# EAGLE board 12668-ACS723_Low_Current_Sensor-panel.v10 (EAGLE 7.5.0), part 1 of 4
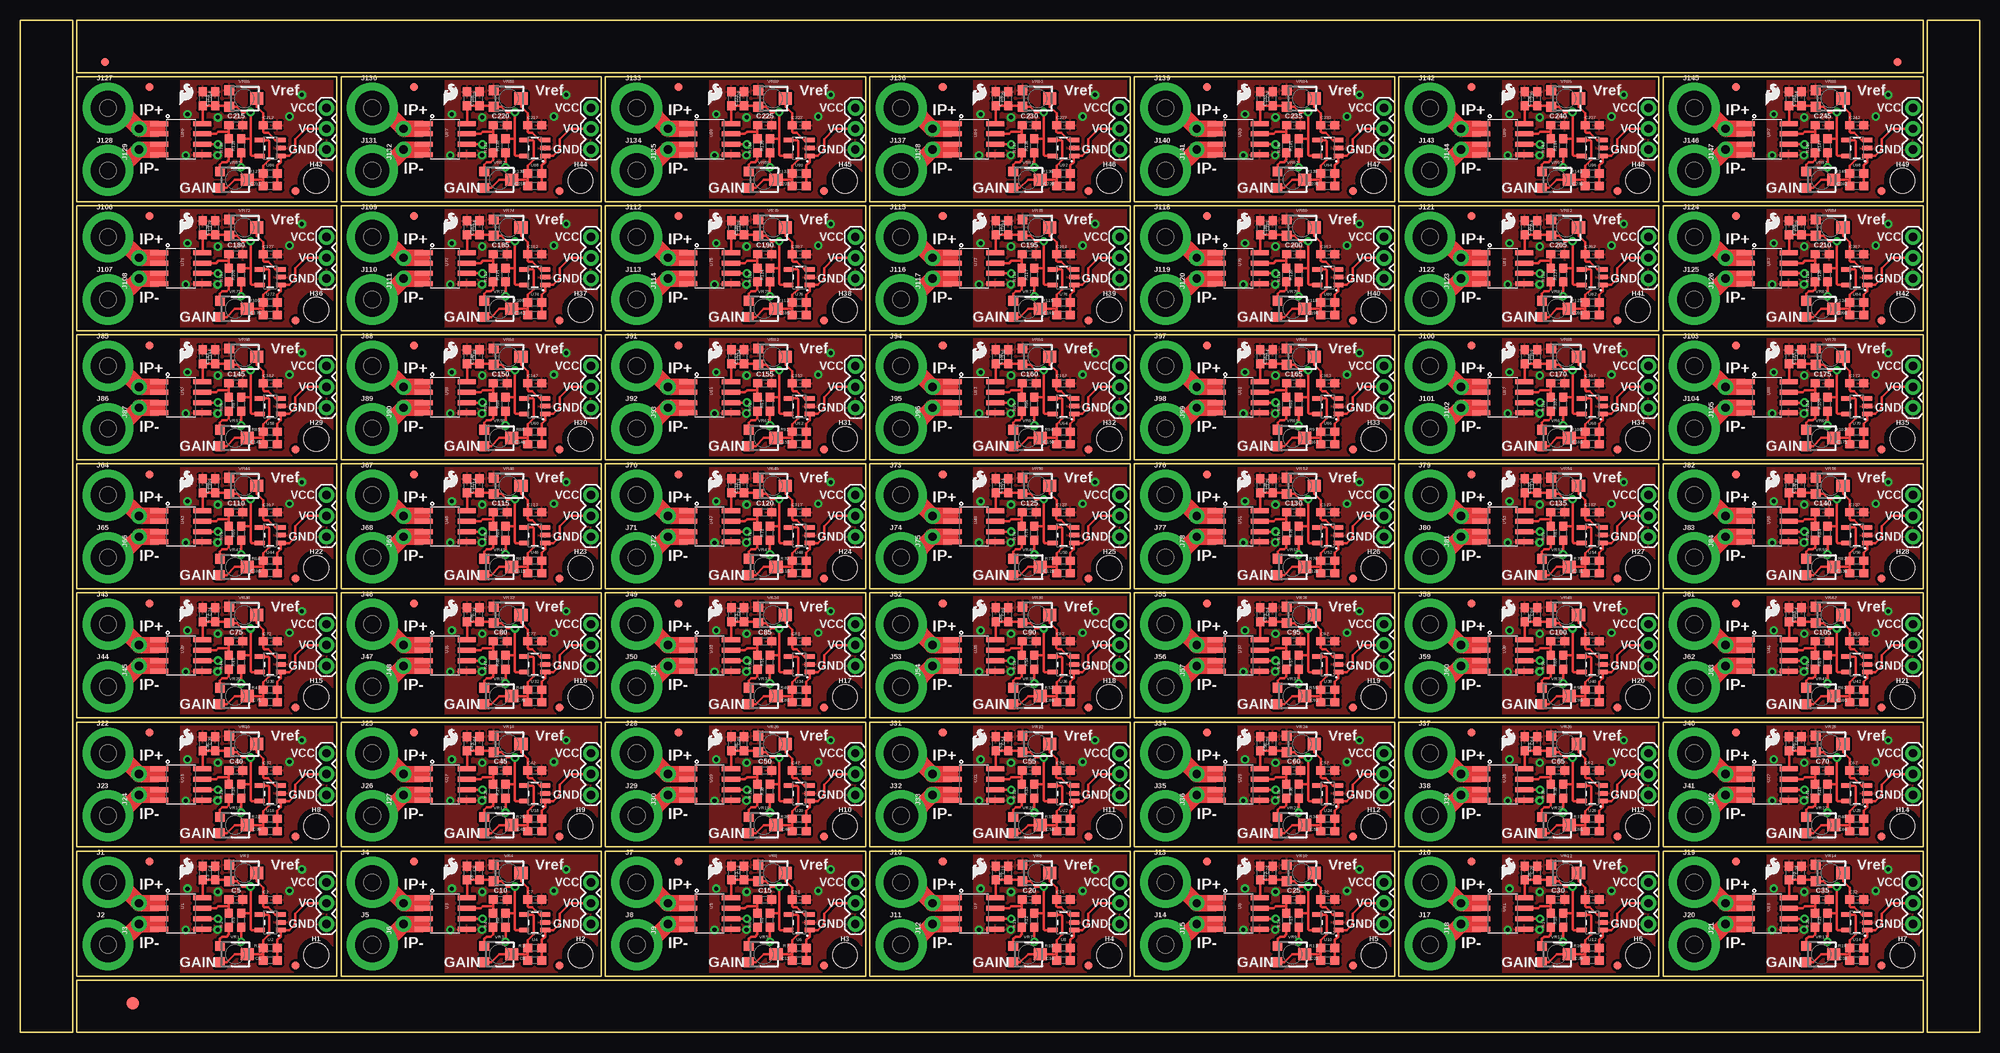
[diagram p0: board, top side]
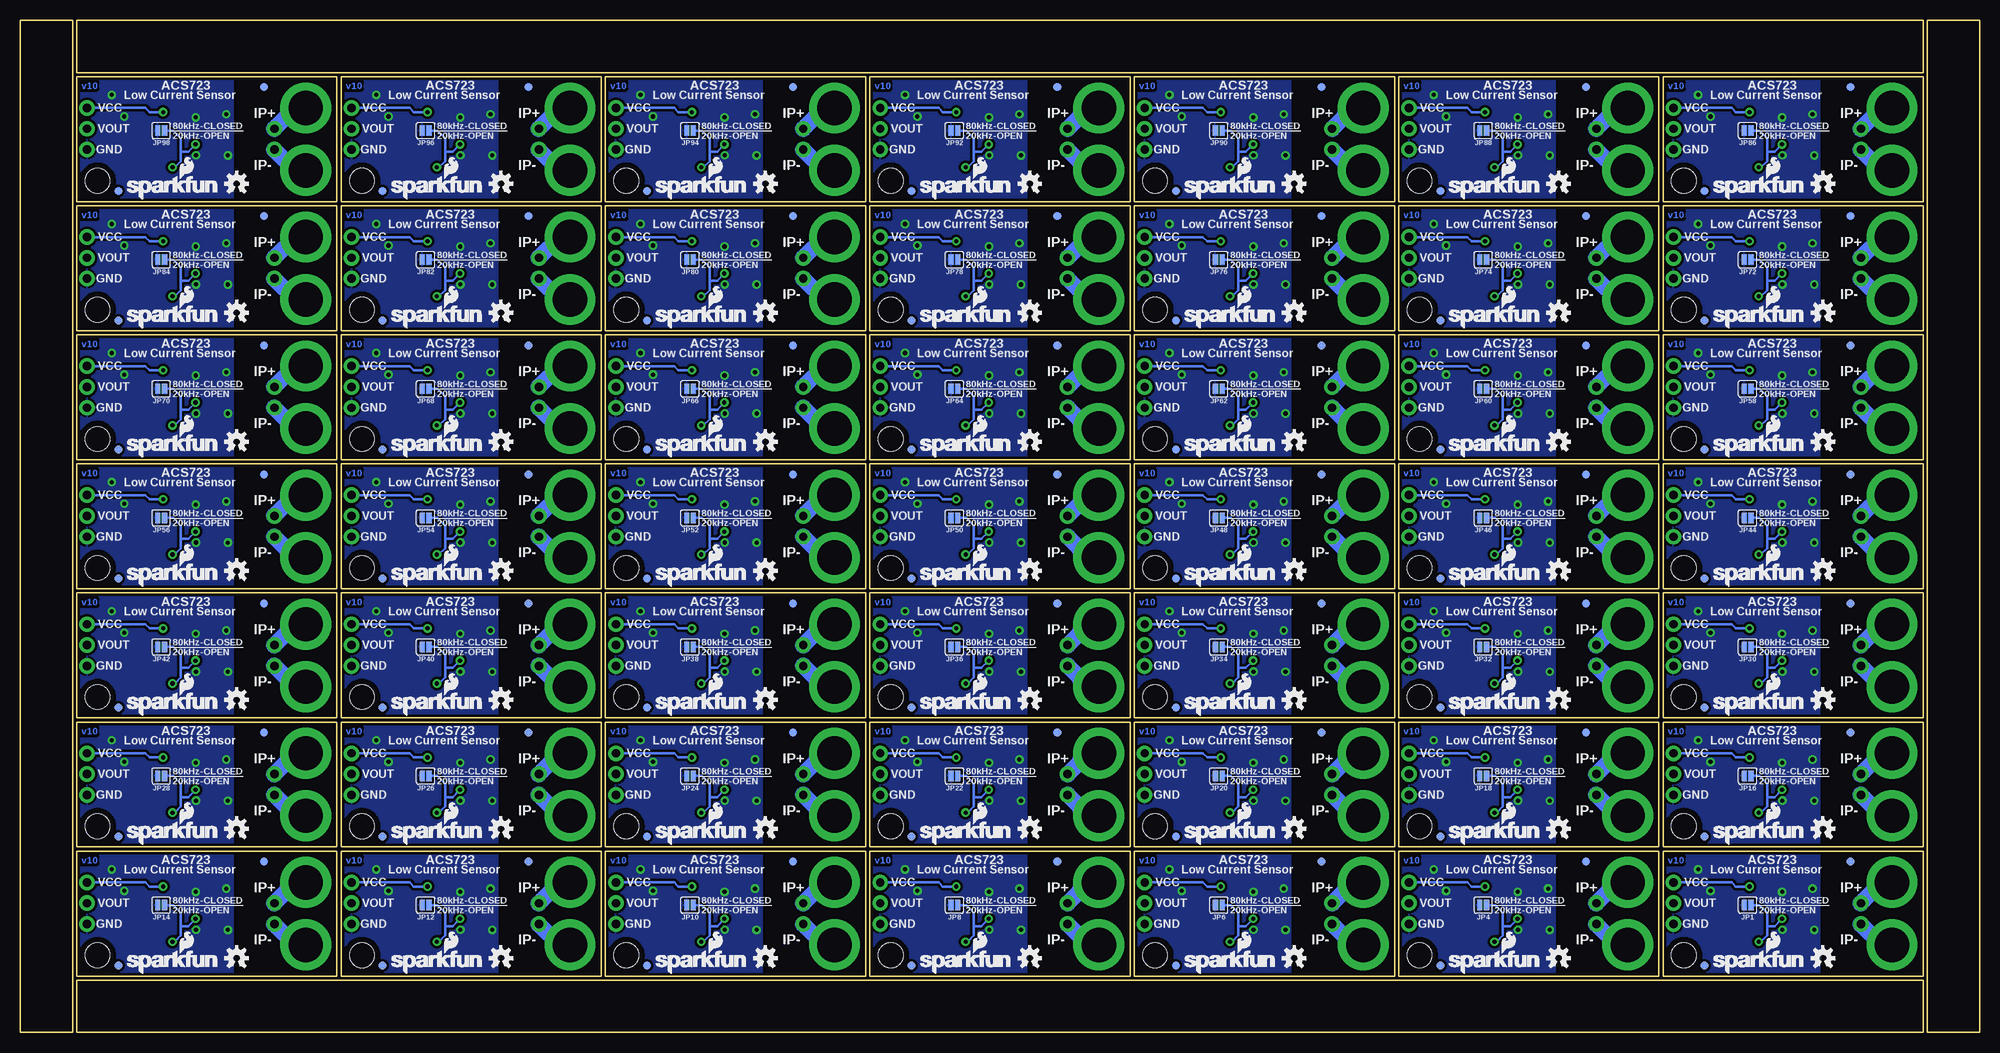
[diagram p1: board, bottom side, seen from below]

Size 239.01 x 123.44 mm. Coordinates in mm from the lower left corner, seen from the top.
Outline: 220 segments
Copper layers (1*16): Top 0.035mm / dielectric 1.5mm / Bottom 0.035mm
Design rules "SparkFun-2-layer-STANDARD": minimum track width 10mil, minimum drill 20mil, track to track 10mil, track to pad 8mil, pad to pad 8mil, via to via 10mil, smd to smd 8mil, copper to edge 8mil, drill to drill 8mil, minimum pad ring 10mil, minimum via ring 10mil, stop-mask expansion 4mil, vias tented up to drill 25mil, thermal gap 10mil
Net classes: 1 8_mil: width 0.203 mm; 2 10_mil: width 0.254 mm; 3 12_mil: width 0.305 mm; 4 15_mil: width 0.381 mm; 5 20_mil: width 0.508 mm; 6 25_mil: width 0.635 mm; 7 30_mil: width 0.762 mm

## Footprints (pad centres in the part's own frame; a part is rotated, then mirrored left to right if it is on the bottom)
0603 = smd 1.1 x 1: 1 -0.85,0; 2 0.85,0
FIDUCIAL-1.5X3 = smd 1.5 x 1.5: 1 0,0
FIDUCIAL-1X2 = smd 1 x 1: 1 0,0
STAND-OFF-TIGHT = hole 3.048: 0,0
SMTSO-256-ET-0.165DIA = drill 4.191 pad 6.198: P$1 0,0
1X02_NO_SILK = drill 1.016 pad 1.88: 1 0,0; 2 2.54,0
SMT-JUMPER_2_NO_SILK = smd 0.635 x 1.27: 1 -0.406,0; 2 0.406,0
1X03 = drill 1.016 pad 1.88: 1 0,0; 2 2.54,0; 3 5.08,0
SO08 = smd 0.61 x 2.21: 1 -1.905,-2.616; 2 -0.635,-2.616; 3 0.635,-2.616; 4 1.905,-2.616; 5 1.905,2.616; 6 0.635,2.616; 7 -0.635,2.616; 8 -1.905,2.616
SOT23-5 = smd 0.55 x 1.2: 1 -0.95,-1.3; 2 0,-1.3; 3 0.95,-1.3; 4 0.95,1.3; 5 -0.95,1.3
TRIMPOT-SMD-TC33X = smd 1.2 x 1.2: 1 -1,-1.825; 3 1,-1.825 | smd 1.5 x 1.6: 2 0,1.5

## Placement (x,y rotation side)
C1  100pF  [0603]  30.48,8.76 180 top
C2  0.1uF  [0603]  30.48,16.19 0 top
C3  0.1uF  [0603]  23.75,19.43 90 top
C4  0.1uF  [0603]  22.23,19.43 270 top
C5  1nF  [0603]  26.29,16.19 0 top
C6  100pF  [0603]  62.74,8.76 180 top
C7  0.1uF  [0603]  62.74,16.19 0 top
C8  0.1uF  [0603]  56.01,19.43 90 top
C9  0.1uF  [0603]  54.48,19.43 270 top
C10  1nF  [0603]  58.55,16.19 0 top
C11  100pF  [0603]  95,8.76 180 top
C12  0.1uF  [0603]  95,16.19 0 top
C13  0.1uF  [0603]  88.27,19.43 90 top
C14  0.1uF  [0603]  86.74,19.43 270 top
C15  1nF  [0603]  90.81,16.19 0 top
C16  100pF  [0603]  127.25,8.76 180 top
C17  0.1uF  [0603]  127.25,16.19 0 top
C18  0.1uF  [0603]  120.52,19.43 90 top
C19  0.1uF  [0603]  119,19.43 270 top
C20  1nF  [0603]  123.06,16.19 0 top
C21  100pF  [0603]  159.51,8.76 180 top
C22  0.1uF  [0603]  159.51,16.19 0 top
C23  0.1uF  [0603]  152.78,19.43 90 top
C24  0.1uF  [0603]  151.26,19.43 270 top
C25  1nF  [0603]  155.32,16.19 0 top
C26  100pF  [0603]  191.77,8.76 180 top
C27  0.1uF  [0603]  191.77,16.19 0 top
C28  0.1uF  [0603]  185.04,19.43 90 top
C29  0.1uF  [0603]  183.51,19.43 270 top
C30  1nF  [0603]  187.58,16.19 0 top
C31  100pF  [0603]  224.03,8.76 180 top
C32  0.1uF  [0603]  224.03,16.19 0 top
C33  0.1uF  [0603]  217.3,19.43 90 top
C34  0.1uF  [0603]  215.77,19.43 270 top
C35  1nF  [0603]  219.84,16.19 0 top
C36  100pF  [0603]  30.48,24.51 180 top
C37  0.1uF  [0603]  30.48,31.94 0 top
C38  0.1uF  [0603]  23.75,35.18 90 top
C39  0.1uF  [0603]  22.23,35.18 270 top
C40  1nF  [0603]  26.29,31.94 0 top
C41  100pF  [0603]  62.74,24.51 180 top
C42  0.1uF  [0603]  62.74,31.94 0 top
C43  0.1uF  [0603]  56.01,35.18 90 top
C44  0.1uF  [0603]  54.48,35.18 270 top
C45  1nF  [0603]  58.55,31.94 0 top
C46  100pF  [0603]  95,24.51 180 top
C47  0.1uF  [0603]  95,31.94 0 top
C48  0.1uF  [0603]  88.27,35.18 90 top
C49  0.1uF  [0603]  86.74,35.18 270 top
C50  1nF  [0603]  90.81,31.94 0 top
C51  100pF  [0603]  127.25,24.51 180 top
C52  0.1uF  [0603]  127.25,31.94 0 top
C53  0.1uF  [0603]  120.52,35.18 90 top
C54  0.1uF  [0603]  119,35.18 270 top
C55  1nF  [0603]  123.06,31.94 0 top
C56  100pF  [0603]  159.51,24.51 180 top
C57  0.1uF  [0603]  159.51,31.94 0 top
C58  0.1uF  [0603]  152.78,35.18 90 top
C59  0.1uF  [0603]  151.26,35.18 270 top
C60  1nF  [0603]  155.32,31.94 0 top
C61  100pF  [0603]  191.77,24.51 180 top
C62  0.1uF  [0603]  191.77,31.94 0 top
C63  0.1uF  [0603]  185.04,35.18 90 top
C64  0.1uF  [0603]  183.51,35.18 270 top
C65  1nF  [0603]  187.58,31.94 0 top
C66  100pF  [0603]  224.03,24.51 180 top
C67  0.1uF  [0603]  224.03,31.94 0 top
C68  0.1uF  [0603]  217.3,35.18 90 top
C69  0.1uF  [0603]  215.77,35.18 270 top
C70  1nF  [0603]  219.84,31.94 0 top
C71  100pF  [0603]  30.48,40.26 180 top
C72  0.1uF  [0603]  30.48,47.69 0 top
C73  0.1uF  [0603]  23.75,50.93 90 top
C74  0.1uF  [0603]  22.23,50.93 270 top
C75  1nF  [0603]  26.29,47.69 0 top
C76  100pF  [0603]  62.74,40.26 180 top
C77  0.1uF  [0603]  62.74,47.69 0 top
C78  0.1uF  [0603]  56.01,50.93 90 top
C79  0.1uF  [0603]  54.48,50.93 270 top
C80  1nF  [0603]  58.55,47.69 0 top
C81  100pF  [0603]  95,40.26 180 top
C82  0.1uF  [0603]  95,47.69 0 top
C83  0.1uF  [0603]  88.27,50.93 90 top
C84  0.1uF  [0603]  86.74,50.93 270 top
C85  1nF  [0603]  90.81,47.69 0 top
C86  100pF  [0603]  127.25,40.26 180 top
C87  0.1uF  [0603]  127.25,47.69 0 top
C88  0.1uF  [0603]  120.52,50.93 90 top
C89  0.1uF  [0603]  119,50.93 270 top
C90  1nF  [0603]  123.06,47.69 0 top
C91  100pF  [0603]  159.51,40.26 180 top
C92  0.1uF  [0603]  159.51,47.69 0 top
C93  0.1uF  [0603]  152.78,50.93 90 top
C94  0.1uF  [0603]  151.26,50.93 270 top
C95  1nF  [0603]  155.32,47.69 0 top
C96  100pF  [0603]  191.77,40.26 180 top
C97  0.1uF  [0603]  191.77,47.69 0 top
C98  0.1uF  [0603]  185.04,50.93 90 top
C99  0.1uF  [0603]  183.51,50.93 270 top
C100  1nF  [0603]  187.58,47.69 0 top
C101  100pF  [0603]  224.03,40.26 180 top
C102  0.1uF  [0603]  224.03,47.69 0 top
C103  0.1uF  [0603]  217.3,50.93 90 top
C104  0.1uF  [0603]  215.77,50.93 270 top
C105  1nF  [0603]  219.84,47.69 0 top
C106  100pF  [0603]  30.48,56.01 180 top
C107  0.1uF  [0603]  30.48,63.44 0 top
C108  0.1uF  [0603]  23.75,66.67 90 top
C109  0.1uF  [0603]  22.23,66.67 270 top
C110  1nF  [0603]  26.29,63.44 0 top
C111  100pF  [0603]  62.74,56.01 180 top
C112  0.1uF  [0603]  62.74,63.44 0 top
C113  0.1uF  [0603]  56.01,66.67 90 top
C114  0.1uF  [0603]  54.48,66.67 270 top
C115  1nF  [0603]  58.55,63.44 0 top
C116  100pF  [0603]  95,56.01 180 top
C117  0.1uF  [0603]  95,63.44 0 top
C118  0.1uF  [0603]  88.27,66.67 90 top
C119  0.1uF  [0603]  86.74,66.67 270 top
C120  1nF  [0603]  90.81,63.44 0 top
C121  100pF  [0603]  127.25,56.01 180 top
C122  0.1uF  [0603]  127.25,63.44 0 top
C123  0.1uF  [0603]  120.52,66.67 90 top
C124  0.1uF  [0603]  119,66.67 270 top
C125  1nF  [0603]  123.06,63.44 0 top
C126  100pF  [0603]  159.51,56.01 180 top
C127  0.1uF  [0603]  159.51,63.44 0 top
C128  0.1uF  [0603]  152.78,66.67 90 top
C129  0.1uF  [0603]  151.26,66.67 270 top
C130  1nF  [0603]  155.32,63.44 0 top
C131  100pF  [0603]  191.77,56.01 180 top
C132  0.1uF  [0603]  191.77,63.44 0 top
C133  0.1uF  [0603]  185.04,66.67 90 top
C134  0.1uF  [0603]  183.51,66.67 270 top
C135  1nF  [0603]  187.58,63.44 0 top
C136  100pF  [0603]  224.03,56.01 180 top
C137  0.1uF  [0603]  224.03,63.44 0 top
C138  0.1uF  [0603]  217.3,66.67 90 top
C139  0.1uF  [0603]  215.77,66.67 270 top
C140  1nF  [0603]  219.84,63.44 0 top
C141  100pF  [0603]  30.48,71.75 180 top
C142  0.1uF  [0603]  30.48,79.18 0 top
C143  0.1uF  [0603]  23.75,82.42 90 top
C144  0.1uF  [0603]  22.23,82.42 270 top
C145  1nF  [0603]  26.29,79.18 0 top
C146  100pF  [0603]  62.74,71.75 180 top
C147  0.1uF  [0603]  62.74,79.18 0 top
C148  0.1uF  [0603]  56.01,82.42 90 top
C149  0.1uF  [0603]  54.48,82.42 270 top
C150  1nF  [0603]  58.55,79.18 0 top
C151  100pF  [0603]  95,71.75 180 top
C152  0.1uF  [0603]  95,79.18 0 top
C153  0.1uF  [0603]  88.27,82.42 90 top
C154  0.1uF  [0603]  86.74,82.42 270 top
C155  1nF  [0603]  90.81,79.18 0 top
C156  100pF  [0603]  127.25,71.75 180 top
C157  0.1uF  [0603]  127.25,79.18 0 top
C158  0.1uF  [0603]  120.52,82.42 90 top
C159  0.1uF  [0603]  119,82.42 270 top
C160  1nF  [0603]  123.06,79.18 0 top
C161  100pF  [0603]  159.51,71.75 180 top
C162  0.1uF  [0603]  159.51,79.18 0 top
C163  0.1uF  [0603]  152.78,82.42 90 top
C164  0.1uF  [0603]  151.26,82.42 270 top
C165  1nF  [0603]  155.32,79.18 0 top
C166  100pF  [0603]  191.77,71.75 180 top
C167  0.1uF  [0603]  191.77,79.18 0 top
C168  0.1uF  [0603]  185.04,82.42 90 top
C169  0.1uF  [0603]  183.51,82.42 270 top
C170  1nF  [0603]  187.58,79.18 0 top
C171  100pF  [0603]  224.03,71.75 180 top
C172  0.1uF  [0603]  224.03,79.18 0 top
C173  0.1uF  [0603]  217.3,82.42 90 top
C174  0.1uF  [0603]  215.77,82.42 270 top
C175  1nF  [0603]  219.84,79.18 0 top
C176  100pF  [0603]  30.48,87.5 180 top
C177  0.1uF  [0603]  30.48,94.93 0 top
C178  0.1uF  [0603]  23.75,98.17 90 top
C179  0.1uF  [0603]  22.23,98.17 270 top
C180  1nF  [0603]  26.29,94.93 0 top
C181  100pF  [0603]  62.74,87.5 180 top
C182  0.1uF  [0603]  62.74,94.93 0 top
C183  0.1uF  [0603]  56.01,98.17 90 top
C184  0.1uF  [0603]  54.48,98.17 270 top
C185  1nF  [0603]  58.55,94.93 0 top
C186  100pF  [0603]  95,87.5 180 top
C187  0.1uF  [0603]  95,94.93 0 top
C188  0.1uF  [0603]  88.27,98.17 90 top
C189  0.1uF  [0603]  86.74,98.17 270 top
C190  1nF  [0603]  90.81,94.93 0 top
C191  100pF  [0603]  127.25,87.5 180 top
C192  0.1uF  [0603]  127.25,94.93 0 top
C193  0.1uF  [0603]  120.52,98.17 90 top
C194  0.1uF  [0603]  119,98.17 270 top
C195  1nF  [0603]  123.06,94.93 0 top
C196  100pF  [0603]  159.51,87.5 180 top
C197  0.1uF  [0603]  159.51,94.93 0 top
C198  0.1uF  [0603]  152.78,98.17 90 top
C199  0.1uF  [0603]  151.26,98.17 270 top
C200  1nF  [0603]  155.32,94.93 0 top
C201  100pF  [0603]  191.77,87.5 180 top
C202  0.1uF  [0603]  191.77,94.93 0 top
C203  0.1uF  [0603]  185.04,98.17 90 top
C204  0.1uF  [0603]  183.51,98.17 270 top
C205  1nF  [0603]  187.58,94.93 0 top
C206  100pF  [0603]  224.03,87.5 180 top
C207  0.1uF  [0603]  224.03,94.93 0 top
C208  0.1uF  [0603]  217.3,98.17 90 top
C209  0.1uF  [0603]  215.77,98.17 270 top
C210  1nF  [0603]  219.84,94.93 0 top
C211  100pF  [0603]  30.48,103.25 180 top
C212  0.1uF  [0603]  30.48,110.68 0 top
C213  0.1uF  [0603]  23.75,113.92 90 top
C214  0.1uF  [0603]  22.23,113.92 270 top
C215  1nF  [0603]  26.29,110.68 0 top
C216  100pF  [0603]  62.74,103.25 180 top
C217  0.1uF  [0603]  62.74,110.68 0 top
C218  0.1uF  [0603]  56.01,113.92 90 top
C219  0.1uF  [0603]  54.48,113.92 270 top
C220  1nF  [0603]  58.55,110.68 0 top
C221  100pF  [0603]  95,103.25 180 top
C222  0.1uF  [0603]  95,110.68 0 top
C223  0.1uF  [0603]  88.27,113.92 90 top
C224  0.1uF  [0603]  86.74,113.92 270 top
C225  1nF  [0603]  90.81,110.68 0 top
C226  100pF  [0603]  127.25,103.25 180 top
C227  0.1uF  [0603]  127.25,110.68 0 top
C228  0.1uF  [0603]  120.52,113.92 90 top
C229  0.1uF  [0603]  119,113.92 270 top
C230  1nF  [0603]  123.06,110.68 0 top
C231  100pF  [0603]  159.51,103.25 180 top
C232  0.1uF  [0603]  159.51,110.68 0 top
C233  0.1uF  [0603]  152.78,113.92 90 top
C234  0.1uF  [0603]  151.26,113.92 270 top
C235  1nF  [0603]  155.32,110.68 0 top
C236  100pF  [0603]  191.77,103.25 180 top
C237  0.1uF  [0603]  191.77,110.68 0 top
C238  0.1uF  [0603]  185.04,113.92 90 top
C239  0.1uF  [0603]  183.51,113.92 270 top
C240  1nF  [0603]  187.58,110.68 0 top
C241  100pF  [0603]  224.03,103.25 180 top
C242  0.1uF  [0603]  224.03,110.68 0 top
C243  0.1uF  [0603]  217.3,113.92 90 top
C244  0.1uF  [0603]  215.77,113.92 270 top
C245  1nF  [0603]  219.84,110.68 0 top
E$1  [FIDUCIAL-1.5X3]  13.72,3.56 0 top
E$7  [FIDUCIAL-1X2]  228.98,118.36 180 top
E$8  [FIDUCIAL-1X2]  10.29,118.36 0 top
FD1  FIDUCIAL1X2  [FIDUCIAL-1X2]  15.75,20.83 0 top
FD2  FIDUCIAL1X2  [FIDUCIAL-1X2]  15.75,20.83 0 bottom
FD3  FIDUCIAL1X2  [FIDUCIAL-1X2]  33.53,8.13 0 top
FD4  FIDUCIAL1X2  [FIDUCIAL-1X2]  33.53,8.13 0 bottom
FD5  FIDUCIAL1X2  [FIDUCIAL-1X2]  48.01,20.83 0 top
FD6  FIDUCIAL1X2  [FIDUCIAL-1X2]  48.01,20.83 0 bottom
FD7  FIDUCIAL1X2  [FIDUCIAL-1X2]  65.79,8.13 0 top
FD8  FIDUCIAL1X2  [FIDUCIAL-1X2]  65.79,8.13 0 bottom
FD9  FIDUCIAL1X2  [FIDUCIAL-1X2]  80.26,20.83 0 top
FD10  FIDUCIAL1X2  [FIDUCIAL-1X2]  80.26,20.83 0 bottom
FD11  FIDUCIAL1X2  [FIDUCIAL-1X2]  98.04,8.13 0 top
FD12  FIDUCIAL1X2  [FIDUCIAL-1X2]  98.04,8.13 0 bottom
FD13  FIDUCIAL1X2  [FIDUCIAL-1X2]  112.52,20.83 0 top
FD14  FIDUCIAL1X2  [FIDUCIAL-1X2]  112.52,20.83 0 bottom
FD15  FIDUCIAL1X2  [FIDUCIAL-1X2]  130.3,8.13 0 top
FD16  FIDUCIAL1X2  [FIDUCIAL-1X2]  130.3,8.13 0 bottom
FD17  FIDUCIAL1X2  [FIDUCIAL-1X2]  144.78,20.83 0 top
FD18  FIDUCIAL1X2  [FIDUCIAL-1X2]  144.78,20.83 0 bottom
FD19  FIDUCIAL1X2  [FIDUCIAL-1X2]  162.56,8.13 0 top
FD20  FIDUCIAL1X2  [FIDUCIAL-1X2]  162.56,8.13 0 bottom
FD21  FIDUCIAL1X2  [FIDUCIAL-1X2]  177.04,20.83 0 top
FD22  FIDUCIAL1X2  [FIDUCIAL-1X2]  177.04,20.83 0 bottom
FD23  FIDUCIAL1X2  [FIDUCIAL-1X2]  194.82,8.13 0 top
FD24  FIDUCIAL1X2  [FIDUCIAL-1X2]  194.82,8.13 0 bottom
FD25  FIDUCIAL1X2  [FIDUCIAL-1X2]  209.3,20.83 0 top
FD26  FIDUCIAL1X2  [FIDUCIAL-1X2]  209.3,20.83 0 bottom
FD27  FIDUCIAL1X2  [FIDUCIAL-1X2]  227.08,8.13 0 top
FD28  FIDUCIAL1X2  [FIDUCIAL-1X2]  227.08,8.13 0 bottom
FD29  FIDUCIAL1X2  [FIDUCIAL-1X2]  15.75,36.58 0 top
FD30  FIDUCIAL1X2  [FIDUCIAL-1X2]  15.75,36.58 0 bottom
FD31  FIDUCIAL1X2  [FIDUCIAL-1X2]  33.53,23.88 0 top
FD32  FIDUCIAL1X2  [FIDUCIAL-1X2]  33.53,23.88 0 bottom
FD33  FIDUCIAL1X2  [FIDUCIAL-1X2]  48.01,36.58 0 top
FD34  FIDUCIAL1X2  [FIDUCIAL-1X2]  48.01,36.58 0 bottom
FD35  FIDUCIAL1X2  [FIDUCIAL-1X2]  65.79,23.88 0 top
FD36  FIDUCIAL1X2  [FIDUCIAL-1X2]  65.79,23.88 0 bottom
FD37  FIDUCIAL1X2  [FIDUCIAL-1X2]  80.26,36.58 0 top
FD38  FIDUCIAL1X2  [FIDUCIAL-1X2]  80.26,36.58 0 bottom
FD39  FIDUCIAL1X2  [FIDUCIAL-1X2]  98.04,23.88 0 top
FD40  FIDUCIAL1X2  [FIDUCIAL-1X2]  98.04,23.88 0 bottom
FD41  FIDUCIAL1X2  [FIDUCIAL-1X2]  112.52,36.58 0 top
FD42  FIDUCIAL1X2  [FIDUCIAL-1X2]  112.52,36.58 0 bottom
FD43  FIDUCIAL1X2  [FIDUCIAL-1X2]  130.3,23.88 0 top
FD44  FIDUCIAL1X2  [FIDUCIAL-1X2]  130.3,23.88 0 bottom
FD45  FIDUCIAL1X2  [FIDUCIAL-1X2]  144.78,36.58 0 top
FD46  FIDUCIAL1X2  [FIDUCIAL-1X2]  144.78,36.58 0 bottom
FD47  FIDUCIAL1X2  [FIDUCIAL-1X2]  162.56,23.88 0 top
FD48  FIDUCIAL1X2  [FIDUCIAL-1X2]  162.56,23.88 0 bottom
FD49  FIDUCIAL1X2  [FIDUCIAL-1X2]  177.04,36.58 0 top
FD50  FIDUCIAL1X2  [FIDUCIAL-1X2]  177.04,36.58 0 bottom
FD51  FIDUCIAL1X2  [FIDUCIAL-1X2]  194.82,23.88 0 top
FD52  FIDUCIAL1X2  [FIDUCIAL-1X2]  194.82,23.88 0 bottom
FD53  FIDUCIAL1X2  [FIDUCIAL-1X2]  209.3,36.58 0 top
FD54  FIDUCIAL1X2  [FIDUCIAL-1X2]  209.3,36.58 0 bottom
FD55  FIDUCIAL1X2  [FIDUCIAL-1X2]  227.08,23.88 0 top
FD56  FIDUCIAL1X2  [FIDUCIAL-1X2]  227.08,23.88 0 bottom
FD57  FIDUCIAL1X2  [FIDUCIAL-1X2]  15.75,52.32 0 top
FD58  FIDUCIAL1X2  [FIDUCIAL-1X2]  15.75,52.32 0 bottom
FD59  FIDUCIAL1X2  [FIDUCIAL-1X2]  33.53,39.62 0 top
FD60  FIDUCIAL1X2  [FIDUCIAL-1X2]  33.53,39.62 0 bottom
FD61  FIDUCIAL1X2  [FIDUCIAL-1X2]  48.01,52.32 0 top
FD62  FIDUCIAL1X2  [FIDUCIAL-1X2]  48.01,52.32 0 bottom
FD63  FIDUCIAL1X2  [FIDUCIAL-1X2]  65.79,39.62 0 top
FD64  FIDUCIAL1X2  [FIDUCIAL-1X2]  65.79,39.62 0 bottom
FD65  FIDUCIAL1X2  [FIDUCIAL-1X2]  80.26,52.32 0 top
FD66  FIDUCIAL1X2  [FIDUCIAL-1X2]  80.26,52.32 0 bottom
FD67  FIDUCIAL1X2  [FIDUCIAL-1X2]  98.04,39.62 0 top
FD68  FIDUCIAL1X2  [FIDUCIAL-1X2]  98.04,39.62 0 bottom
FD69  FIDUCIAL1X2  [FIDUCIAL-1X2]  112.52,52.32 0 top
FD70  FIDUCIAL1X2  [FIDUCIAL-1X2]  112.52,52.32 0 bottom
FD71  FIDUCIAL1X2  [FIDUCIAL-1X2]  130.3,39.62 0 top
FD72  FIDUCIAL1X2  [FIDUCIAL-1X2]  130.3,39.62 0 bottom
FD73  FIDUCIAL1X2  [FIDUCIAL-1X2]  144.78,52.32 0 top
FD74  FIDUCIAL1X2  [FIDUCIAL-1X2]  144.78,52.32 0 bottom
FD75  FIDUCIAL1X2  [FIDUCIAL-1X2]  162.56,39.62 0 top
FD76  FIDUCIAL1X2  [FIDUCIAL-1X2]  162.56,39.62 0 bottom
FD77  FIDUCIAL1X2  [FIDUCIAL-1X2]  177.04,52.32 0 top
FD78  FIDUCIAL1X2  [FIDUCIAL-1X2]  177.04,52.32 0 bottom
FD79  FIDUCIAL1X2  [FIDUCIAL-1X2]  194.82,39.62 0 top
FD80  FIDUCIAL1X2  [FIDUCIAL-1X2]  194.82,39.62 0 bottom
FD81  FIDUCIAL1X2  [FIDUCIAL-1X2]  209.3,52.32 0 top
FD82  FIDUCIAL1X2  [FIDUCIAL-1X2]  209.3,52.32 0 bottom
FD83  FIDUCIAL1X2  [FIDUCIAL-1X2]  227.08,39.62 0 top
FD84  FIDUCIAL1X2  [FIDUCIAL-1X2]  227.08,39.62 0 bottom
FD85  FIDUCIAL1X2  [FIDUCIAL-1X2]  15.75,68.07 0 top
FD86  FIDUCIAL1X2  [FIDUCIAL-1X2]  15.75,68.07 0 bottom
FD87  FIDUCIAL1X2  [FIDUCIAL-1X2]  33.53,55.37 0 top
FD88  FIDUCIAL1X2  [FIDUCIAL-1X2]  33.53,55.37 0 bottom
FD89  FIDUCIAL1X2  [FIDUCIAL-1X2]  48.01,68.07 0 top
FD90  FIDUCIAL1X2  [FIDUCIAL-1X2]  48.01,68.07 0 bottom
FD91  FIDUCIAL1X2  [FIDUCIAL-1X2]  65.79,55.37 0 top
FD92  FIDUCIAL1X2  [FIDUCIAL-1X2]  65.79,55.37 0 bottom
FD93  FIDUCIAL1X2  [FIDUCIAL-1X2]  80.26,68.07 0 top
FD94  FIDUCIAL1X2  [FIDUCIAL-1X2]  80.26,68.07 0 bottom
FD95  FIDUCIAL1X2  [FIDUCIAL-1X2]  98.04,55.37 0 top
FD96  FIDUCIAL1X2  [FIDUCIAL-1X2]  98.04,55.37 0 bottom
FD97  FIDUCIAL1X2  [FIDUCIAL-1X2]  112.52,68.07 0 top
FD98  FIDUCIAL1X2  [FIDUCIAL-1X2]  112.52,68.07 0 bottom
FD99  FIDUCIAL1X2  [FIDUCIAL-1X2]  130.3,55.37 0 top
FD100  FIDUCIAL1X2  [FIDUCIAL-1X2]  130.3,55.37 0 bottom
FD101  FIDUCIAL1X2  [FIDUCIAL-1X2]  144.78,68.07 0 top
FD102  FIDUCIAL1X2  [FIDUCIAL-1X2]  144.78,68.07 0 bottom
FD103  FIDUCIAL1X2  [FIDUCIAL-1X2]  162.56,55.37 0 top
FD104  FIDUCIAL1X2  [FIDUCIAL-1X2]  162.56,55.37 0 bottom
FD105  FIDUCIAL1X2  [FIDUCIAL-1X2]  177.04,68.07 0 top
FD106  FIDUCIAL1X2  [FIDUCIAL-1X2]  177.04,68.07 0 bottom
FD107  FIDUCIAL1X2  [FIDUCIAL-1X2]  194.82,55.37 0 top
FD108  FIDUCIAL1X2  [FIDUCIAL-1X2]  194.82,55.37 0 bottom
FD109  FIDUCIAL1X2  [FIDUCIAL-1X2]  209.3,68.07 0 top
FD110  FIDUCIAL1X2  [FIDUCIAL-1X2]  209.3,68.07 0 bottom
FD111  FIDUCIAL1X2  [FIDUCIAL-1X2]  227.08,55.37 0 top
FD112  FIDUCIAL1X2  [FIDUCIAL-1X2]  227.08,55.37 0 bottom
FD113  FIDUCIAL1X2  [FIDUCIAL-1X2]  15.75,83.82 0 top
FD114  FIDUCIAL1X2  [FIDUCIAL-1X2]  15.75,83.82 0 bottom
FD115  FIDUCIAL1X2  [FIDUCIAL-1X2]  33.53,71.12 0 top
FD116  FIDUCIAL1X2  [FIDUCIAL-1X2]  33.53,71.12 0 bottom
FD117  FIDUCIAL1X2  [FIDUCIAL-1X2]  48.01,83.82 0 top
FD118  FIDUCIAL1X2  [FIDUCIAL-1X2]  48.01,83.82 0 bottom
FD119  FIDUCIAL1X2  [FIDUCIAL-1X2]  65.79,71.12 0 top
FD120  FIDUCIAL1X2  [FIDUCIAL-1X2]  65.79,71.12 0 bottom
FD121  FIDUCIAL1X2  [FIDUCIAL-1X2]  80.26,83.82 0 top
FD122  FIDUCIAL1X2  [FIDUCIAL-1X2]  80.26,83.82 0 bottom
FD123  FIDUCIAL1X2  [FIDUCIAL-1X2]  98.04,71.12 0 top
FD124  FIDUCIAL1X2  [FIDUCIAL-1X2]  98.04,71.12 0 bottom
FD125  FIDUCIAL1X2  [FIDUCIAL-1X2]  112.52,83.82 0 top
FD126  FIDUCIAL1X2  [FIDUCIAL-1X2]  112.52,83.82 0 bottom
FD127  FIDUCIAL1X2  [FIDUCIAL-1X2]  130.3,71.12 0 top
FD128  FIDUCIAL1X2  [FIDUCIAL-1X2]  130.3,71.12 0 bottom
FD129  FIDUCIAL1X2  [FIDUCIAL-1X2]  144.78,83.82 0 top
FD130  FIDUCIAL1X2  [FIDUCIAL-1X2]  144.78,83.82 0 bottom
FD131  FIDUCIAL1X2  [FIDUCIAL-1X2]  162.56,71.12 0 top
FD132  FIDUCIAL1X2  [FIDUCIAL-1X2]  162.56,71.12 0 bottom
FD133  FIDUCIAL1X2  [FIDUCIAL-1X2]  177.04,83.82 0 top
FD134  FIDUCIAL1X2  [FIDUCIAL-1X2]  177.04,83.82 0 bottom
FD135  FIDUCIAL1X2  [FIDUCIAL-1X2]  194.82,71.12 0 top
FD136  FIDUCIAL1X2  [FIDUCIAL-1X2]  194.82,71.12 0 bottom
FD137  FIDUCIAL1X2  [FIDUCIAL-1X2]  209.3,83.82 0 top
FD138  FIDUCIAL1X2  [FIDUCIAL-1X2]  209.3,83.82 0 bottom
FD139  FIDUCIAL1X2  [FIDUCIAL-1X2]  227.08,71.12 0 top
FD140  FIDUCIAL1X2  [FIDUCIAL-1X2]  227.08,71.12 0 bottom
FD141  FIDUCIAL1X2  [FIDUCIAL-1X2]  15.75,99.57 0 top
FD142  FIDUCIAL1X2  [FIDUCIAL-1X2]  15.75,99.57 0 bottom
FD143  FIDUCIAL1X2  [FIDUCIAL-1X2]  33.53,86.87 0 top
FD144  FIDUCIAL1X2  [FIDUCIAL-1X2]  33.53,86.87 0 bottom
FD145  FIDUCIAL1X2  [FIDUCIAL-1X2]  48.01,99.57 0 top
FD146  FIDUCIAL1X2  [FIDUCIAL-1X2]  48.01,99.57 0 bottom
FD147  FIDUCIAL1X2  [FIDUCIAL-1X2]  65.79,86.87 0 top
FD148  FIDUCIAL1X2  [FIDUCIAL-1X2]  65.79,86.87 0 bottom
FD149  FIDUCIAL1X2  [FIDUCIAL-1X2]  80.26,99.57 0 top
FD150  FIDUCIAL1X2  [FIDUCIAL-1X2]  80.26,99.57 0 bottom
FD151  FIDUCIAL1X2  [FIDUCIAL-1X2]  98.04,86.87 0 top
FD152  FIDUCIAL1X2  [FIDUCIAL-1X2]  98.04,86.87 0 bottom
FD153  FIDUCIAL1X2  [FIDUCIAL-1X2]  112.52,99.57 0 top
FD154  FIDUCIAL1X2  [FIDUCIAL-1X2]  112.52,99.57 0 bottom
FD155  FIDUCIAL1X2  [FIDUCIAL-1X2]  130.3,86.87 0 top
FD156  FIDUCIAL1X2  [FIDUCIAL-1X2]  130.3,86.87 0 bottom
FD157  FIDUCIAL1X2  [FIDUCIAL-1X2]  144.78,99.57 0 top
FD158  FIDUCIAL1X2  [FIDUCIAL-1X2]  144.78,99.57 0 bottom
FD159  FIDUCIAL1X2  [FIDUCIAL-1X2]  162.56,86.87 0 top
FD160  FIDUCIAL1X2  [FIDUCIAL-1X2]  162.56,86.87 0 bottom
FD161  FIDUCIAL1X2  [FIDUCIAL-1X2]  177.04,99.57 0 top
FD162  FIDUCIAL1X2  [FIDUCIAL-1X2]  177.04,99.57 0 bottom
FD163  FIDUCIAL1X2  [FIDUCIAL-1X2]  194.82,86.87 0 top
FD164  FIDUCIAL1X2  [FIDUCIAL-1X2]  194.82,86.87 0 bottom
FD165  FIDUCIAL1X2  [FIDUCIAL-1X2]  209.3,99.57 0 top
FD166  FIDUCIAL1X2  [FIDUCIAL-1X2]  209.3,99.57 0 bottom
FD167  FIDUCIAL1X2  [FIDUCIAL-1X2]  227.08,86.87 0 top
FD168  FIDUCIAL1X2  [FIDUCIAL-1X2]  227.08,86.87 0 bottom
FD169  FIDUCIAL1X2  [FIDUCIAL-1X2]  15.75,115.32 0 top
FD170  FIDUCIAL1X2  [FIDUCIAL-1X2]  15.75,115.32 0 bottom
FD171  FIDUCIAL1X2  [FIDUCIAL-1X2]  33.53,102.62 0 top
FD172  FIDUCIAL1X2  [FIDUCIAL-1X2]  33.53,102.62 0 bottom
FD173  FIDUCIAL1X2  [FIDUCIAL-1X2]  48.01,115.32 0 top
FD174  FIDUCIAL1X2  [FIDUCIAL-1X2]  48.01,115.32 0 bottom
FD175  FIDUCIAL1X2  [FIDUCIAL-1X2]  65.79,102.62 0 top
FD176  FIDUCIAL1X2  [FIDUCIAL-1X2]  65.79,102.62 0 bottom
FD177  FIDUCIAL1X2  [FIDUCIAL-1X2]  80.26,115.32 0 top
FD178  FIDUCIAL1X2  [FIDUCIAL-1X2]  80.26,115.32 0 bottom
FD179  FIDUCIAL1X2  [FIDUCIAL-1X2]  98.04,102.62 0 top
FD180  FIDUCIAL1X2  [FIDUCIAL-1X2]  98.04,102.62 0 bottom
FD181  FIDUCIAL1X2  [FIDUCIAL-1X2]  112.52,115.32 0 top
FD182  FIDUCIAL1X2  [FIDUCIAL-1X2]  112.52,115.32 0 bottom
FD183  FIDUCIAL1X2  [FIDUCIAL-1X2]  130.3,102.62 0 top
FD184  FIDUCIAL1X2  [FIDUCIAL-1X2]  130.3,102.62 0 bottom
FD185  FIDUCIAL1X2  [FIDUCIAL-1X2]  144.78,115.32 0 top
FD186  FIDUCIAL1X2  [FIDUCIAL-1X2]  144.78,115.32 0 bottom
FD187  FIDUCIAL1X2  [FIDUCIAL-1X2]  162.56,102.62 0 top
FD188  FIDUCIAL1X2  [FIDUCIAL-1X2]  162.56,102.62 0 bottom
FD189  FIDUCIAL1X2  [FIDUCIAL-1X2]  177.04,115.32 0 top
FD190  FIDUCIAL1X2  [FIDUCIAL-1X2]  177.04,115.32 0 bottom
FD191  FIDUCIAL1X2  [FIDUCIAL-1X2]  194.82,102.62 0 top
FD192  FIDUCIAL1X2  [FIDUCIAL-1X2]  194.82,102.62 0 bottom
FD193  FIDUCIAL1X2  [FIDUCIAL-1X2]  209.3,115.32 0 top
FD194  FIDUCIAL1X2  [FIDUCIAL-1X2]  209.3,115.32 0 bottom
FD195  FIDUCIAL1X2  [FIDUCIAL-1X2]  227.08,102.62 0 top
FD196  FIDUCIAL1X2  [FIDUCIAL-1X2]  227.08,102.62 0 bottom
H1  STAND-OFFTIGHT  [STAND-OFF-TIGHT]  36.07,9.4 0 top
H2  STAND-OFFTIGHT  [STAND-OFF-TIGHT]  68.33,9.4 0 top
H3  STAND-OFFTIGHT  [STAND-OFF-TIGHT]  100.58,9.4 0 top
H4  STAND-OFFTIGHT  [STAND-OFF-TIGHT]  132.84,9.4 0 top
H5  STAND-OFFTIGHT  [STAND-OFF-TIGHT]  165.1,9.4 0 top
H6  STAND-OFFTIGHT  [STAND-OFF-TIGHT]  197.36,9.4 0 top
H7  STAND-OFFTIGHT  [STAND-OFF-TIGHT]  229.62,9.4 0 top
H8  STAND-OFFTIGHT  [STAND-OFF-TIGHT]  36.07,25.15 0 top
H9  STAND-OFFTIGHT  [STAND-OFF-TIGHT]  68.33,25.15 0 top
H10  STAND-OFFTIGHT  [STAND-OFF-TIGHT]  100.58,25.15 0 top
H11  STAND-OFFTIGHT  [STAND-OFF-TIGHT]  132.84,25.15 0 top
H12  STAND-OFFTIGHT  [STAND-OFF-TIGHT]  165.1,25.15 0 top
H13  STAND-OFFTIGHT  [STAND-OFF-TIGHT]  197.36,25.15 0 top
H14  STAND-OFFTIGHT  [STAND-OFF-TIGHT]  229.62,25.15 0 top
H15  STAND-OFFTIGHT  [STAND-OFF-TIGHT]  36.07,40.89 0 top
H16  STAND-OFFTIGHT  [STAND-OFF-TIGHT]  68.33,40.89 0 top
H17  STAND-OFFTIGHT  [STAND-OFF-TIGHT]  100.58,40.89 0 top
H18  STAND-OFFTIGHT  [STAND-OFF-TIGHT]  132.84,40.89 0 top
H19  STAND-OFFTIGHT  [STAND-OFF-TIGHT]  165.1,40.89 0 top
H20  STAND-OFFTIGHT  [STAND-OFF-TIGHT]  197.36,40.89 0 top
H21  STAND-OFFTIGHT  [STAND-OFF-TIGHT]  229.62,40.89 0 top
H22  STAND-OFFTIGHT  [STAND-OFF-TIGHT]  36.07,56.64 0 top
H23  STAND-OFFTIGHT  [STAND-OFF-TIGHT]  68.33,56.64 0 top
H24  STAND-OFFTIGHT  [STAND-OFF-TIGHT]  100.58,56.64 0 top
H25  STAND-OFFTIGHT  [STAND-OFF-TIGHT]  132.84,56.64 0 top
H26  STAND-OFFTIGHT  [STAND-OFF-TIGHT]  165.1,56.64 0 top
H27  STAND-OFFTIGHT  [STAND-OFF-TIGHT]  197.36,56.64 0 top
H28  STAND-OFFTIGHT  [STAND-OFF-TIGHT]  229.62,56.64 0 top
H29  STAND-OFFTIGHT  [STAND-OFF-TIGHT]  36.07,72.39 0 top
H30  STAND-OFFTIGHT  [STAND-OFF-TIGHT]  68.33,72.39 0 top
H31  STAND-OFFTIGHT  [STAND-OFF-TIGHT]  100.58,72.39 0 top
H32  STAND-OFFTIGHT  [STAND-OFF-TIGHT]  132.84,72.39 0 top
H33  STAND-OFFTIGHT  [STAND-OFF-TIGHT]  165.1,72.39 0 top
H34  STAND-OFFTIGHT  [STAND-OFF-TIGHT]  197.36,72.39 0 top
H35  STAND-OFFTIGHT  [STAND-OFF-TIGHT]  229.62,72.39 0 top
H36  STAND-OFFTIGHT  [STAND-OFF-TIGHT]  36.07,88.14 0 top
H37  STAND-OFFTIGHT  [STAND-OFF-TIGHT]  68.33,88.14 0 top
H38  STAND-OFFTIGHT  [STAND-OFF-TIGHT]  100.58,88.14 0 top
H39  STAND-OFFTIGHT  [STAND-OFF-TIGHT]  132.84,88.14 0 top
H40  STAND-OFFTIGHT  [STAND-OFF-TIGHT]  165.1,88.14 0 top
H41  STAND-OFFTIGHT  [STAND-OFF-TIGHT]  197.36,88.14 0 top
H42  STAND-OFFTIGHT  [STAND-OFF-TIGHT]  229.62,88.14 0 top
H43  STAND-OFFTIGHT  [STAND-OFF-TIGHT]  36.07,103.89 0 top
H44  STAND-OFFTIGHT  [STAND-OFF-TIGHT]  68.33,103.89 0 top
H45  STAND-OFFTIGHT  [STAND-OFF-TIGHT]  100.58,103.89 0 top
H46  STAND-OFFTIGHT  [STAND-OFF-TIGHT]  132.84,103.89 0 top
H47  STAND-OFFTIGHT  [STAND-OFF-TIGHT]  165.1,103.89 0 top
H48  STAND-OFFTIGHT  [STAND-OFF-TIGHT]  197.36,103.89 0 top
H49  STAND-OFFTIGHT  [STAND-OFF-TIGHT]  229.62,103.89 0 top
J1  [SMTSO-256-ET-0.165DIA]  10.67,18.29 0 top
J2  [SMTSO-256-ET-0.165DIA]  10.67,10.67 0 top
J3  [1X02_NO_SILK]  14.48,13.21 90 top
J4  [SMTSO-256-ET-0.165DIA]  42.93,18.29 0 top
J5  [SMTSO-256-ET-0.165DIA]  42.93,10.67 0 top
J6  [1X02_NO_SILK]  46.74,13.21 90 top
J7  [SMTSO-256-ET-0.165DIA]  75.18,18.29 0 top
J8  [SMTSO-256-ET-0.165DIA]  75.18,10.67 0 top
J9  [1X02_NO_SILK]  78.99,13.21 90 top
J10  [SMTSO-256-ET-0.165DIA]  107.44,18.29 0 top
J11  [SMTSO-256-ET-0.165DIA]  107.44,10.67 0 top
J12  [1X02_NO_SILK]  111.25,13.21 90 top
J13  [SMTSO-256-ET-0.165DIA]  139.7,18.29 0 top
J14  [SMTSO-256-ET-0.165DIA]  139.7,10.67 0 top
J15  [1X02_NO_SILK]  143.51,13.21 90 top
J16  [SMTSO-256-ET-0.165DIA]  171.96,18.29 0 top
J17  [SMTSO-256-ET-0.165DIA]  171.96,10.67 0 top
J18  [1X02_NO_SILK]  175.77,13.21 90 top
J19  [SMTSO-256-ET-0.165DIA]  204.22,18.29 0 top
J20  [SMTSO-256-ET-0.165DIA]  204.22,10.67 0 top
J21  [1X02_NO_SILK]  208.03,13.21 90 top
J22  [SMTSO-256-ET-0.165DIA]  10.67,34.04 0 top
J23  [SMTSO-256-ET-0.165DIA]  10.67,26.42 0 top
J24  [1X02_NO_SILK]  14.48,28.96 90 top
J25  [SMTSO-256-ET-0.165DIA]  42.93,34.04 0 top
J26  [SMTSO-256-ET-0.165DIA]  42.93,26.42 0 top
J27  [1X02_NO_SILK]  46.74,28.96 90 top
J28  [SMTSO-256-ET-0.165DIA]  75.18,34.04 0 top
J29  [SMTSO-256-ET-0.165DIA]  75.18,26.42 0 top
J30  [1X02_NO_SILK]  78.99,28.96 90 top
J31  [SMTSO-256-ET-0.165DIA]  107.44,34.04 0 top
J32  [SMTSO-256-ET-0.165DIA]  107.44,26.42 0 top
J33  [1X02_NO_SILK]  111.25,28.96 90 top
J34  [SMTSO-256-ET-0.165DIA]  139.7,34.04 0 top
J35  [SMTSO-256-ET-0.165DIA]  139.7,26.42 0 top
J36  [1X02_NO_SILK]  143.51,28.96 90 top
J37  [SMTSO-256-ET-0.165DIA]  171.96,34.04 0 top
J38  [SMTSO-256-ET-0.165DIA]  171.96,26.42 0 top
J39  [1X02_NO_SILK]  175.77,28.96 90 top
J40  [SMTSO-256-ET-0.165DIA]  204.22,34.04 0 top
J41  [SMTSO-256-ET-0.165DIA]  204.22,26.42 0 top
J42  [1X02_NO_SILK]  208.03,28.96 90 top
J43  [SMTSO-256-ET-0.165DIA]  10.67,49.78 0 top
J44  [SMTSO-256-ET-0.165DIA]  10.67,42.16 0 top
J45  [1X02_NO_SILK]  14.48,44.7 90 top
J46  [SMTSO-256-ET-0.165DIA]  42.93,49.78 0 top
J47  [SMTSO-256-ET-0.165DIA]  42.93,42.16 0 top
J48  [1X02_NO_SILK]  46.74,44.7 90 top
J49  [SMTSO-256-ET-0.165DIA]  75.18,49.78 0 top
J50  [SMTSO-256-ET-0.165DIA]  75.18,42.16 0 top
J51  [1X02_NO_SILK]  78.99,44.7 90 top
J52  [SMTSO-256-ET-0.165DIA]  107.44,49.78 0 top
J53  [SMTSO-256-ET-0.165DIA]  107.44,42.16 0 top
J54  [1X02_NO_SILK]  111.25,44.7 90 top
J55  [SMTSO-256-ET-0.165DIA]  139.7,49.78 0 top
J56  [SMTSO-256-ET-0.165DIA]  139.7,42.16 0 top
J57  [1X02_NO_SILK]  143.51,44.7 90 top
J58  [SMTSO-256-ET-0.165DIA]  171.96,49.78 0 top
J59  [SMTSO-256-ET-0.165DIA]  171.96,42.16 0 top
J60  [1X02_NO_SILK]  175.77,44.7 90 top
J61  [SMTSO-256-ET-0.165DIA]  204.22,49.78 0 top
J62  [SMTSO-256-ET-0.165DIA]  204.22,42.16 0 top
J63  [1X02_NO_SILK]  208.03,44.7 90 top
J64  [SMTSO-256-ET-0.165DIA]  10.67,65.53 0 top
J65  [SMTSO-256-ET-0.165DIA]  10.67,57.91 0 top
J66  [1X02_NO_SILK]  14.48,60.45 90 top
J67  [SMTSO-256-ET-0.165DIA]  42.93,65.53 0 top
J68  [SMTSO-256-ET-0.165DIA]  42.93,57.91 0 top
J69  [1X02_NO_SILK]  46.74,60.45 90 top
J70  [SMTSO-256-ET-0.165DIA]  75.18,65.53 0 top
J71  [SMTSO-256-ET-0.165DIA]  75.18,57.91 0 top
J72  [1X02_NO_SILK]  78.99,60.45 90 top
J73  [SMTSO-256-ET-0.165DIA]  107.44,65.53 0 top
J74  [SMTSO-256-ET-0.165DIA]  107.44,57.91 0 top
J75  [1X02_NO_SILK]  111.25,60.45 90 top
J76  [SMTSO-256-ET-0.165DIA]  139.7,65.53 0 top
J77  [SMTSO-256-ET-0.165DIA]  139.7,57.91 0 top
J78  [1X02_NO_SILK]  143.51,60.45 90 top
J79  [SMTSO-256-ET-0.165DIA]  171.96,65.53 0 top
J80  [SMTSO-256-ET-0.165DIA]  171.96,57.91 0 top
J81  [1X02_NO_SILK]  175.77,60.45 90 top
J82  [SMTSO-256-ET-0.165DIA]  204.22,65.53 0 top
J83  [SMTSO-256-ET-0.165DIA]  204.22,57.91 0 top
J84  [1X02_NO_SILK]  208.03,60.45 90 top
J85  [SMTSO-256-ET-0.165DIA]  10.67,81.28 0 top
J86  [SMTSO-256-ET-0.165DIA]  10.67,73.66 0 top
J87  [1X02_NO_SILK]  14.48,76.2 90 top
J88  [SMTSO-256-ET-0.165DIA]  42.93,81.28 0 top
J89  [SMTSO-256-ET-0.165DIA]  42.93,73.66 0 top
J90  [1X02_NO_SILK]  46.74,76.2 90 top
J91  [SMTSO-256-ET-0.165DIA]  75.18,81.28 0 top
J92  [SMTSO-256-ET-0.165DIA]  75.18,73.66 0 top
J93  [1X02_NO_SILK]  78.99,76.2 90 top
J94  [SMTSO-256-ET-0.165DIA]  107.44,81.28 0 top
J95  [SMTSO-256-ET-0.165DIA]  107.44,73.66 0 top
J96  [1X02_NO_SILK]  111.25,76.2 90 top
J97  [SMTSO-256-ET-0.165DIA]  139.7,81.28 0 top
J98  [SMTSO-256-ET-0.165DIA]  139.7,73.66 0 top
J99  [1X02_NO_SILK]  143.51,76.2 90 top
J100  [SMTSO-256-ET-0.165DIA]  171.96,81.28 0 top
J101  [SMTSO-256-ET-0.165DIA]  171.96,73.66 0 top
J102  [1X02_NO_SILK]  175.77,76.2 90 top
J103  [SMTSO-256-ET-0.165DIA]  204.22,81.28 0 top
J104  [SMTSO-256-ET-0.165DIA]  204.22,73.66 0 top
J105  [1X02_NO_SILK]  208.03,76.2 90 top
J106  [SMTSO-256-ET-0.165DIA]  10.67,97.03 0 top
J107  [SMTSO-256-ET-0.165DIA]  10.67,89.41 0 top
J108  [1X02_NO_SILK]  14.48,91.95 90 top
J109  [SMTSO-256-ET-0.165DIA]  42.93,97.03 0 top
J110  [SMTSO-256-ET-0.165DIA]  42.93,89.41 0 top
J111  [1X02_NO_SILK]  46.74,91.95 90 top
J112  [SMTSO-256-ET-0.165DIA]  75.18,97.03 0 top
J113  [SMTSO-256-ET-0.165DIA]  75.18,89.41 0 top
J114  [1X02_NO_SILK]  78.99,91.95 90 top
J115  [SMTSO-256-ET-0.165DIA]  107.44,97.03 0 top
J116  [SMTSO-256-ET-0.165DIA]  107.44,89.41 0 top
J117  [1X02_NO_SILK]  111.25,91.95 90 top
J118  [SMTSO-256-ET-0.165DIA]  139.7,97.03 0 top
J119  [SMTSO-256-ET-0.165DIA]  139.7,89.41 0 top
J120  [1X02_NO_SILK]  143.51,91.95 90 top
J121  [SMTSO-256-ET-0.165DIA]  171.96,97.03 0 top
J122  [SMTSO-256-ET-0.165DIA]  171.96,89.41 0 top
J123  [1X02_NO_SILK]  175.77,91.95 90 top
J124  [SMTSO-256-ET-0.165DIA]  204.22,97.03 0 top
J125  [SMTSO-256-ET-0.165DIA]  204.22,89.41 0 top
J126  [1X02_NO_SILK]  208.03,91.95 90 top
J127  [SMTSO-256-ET-0.165DIA]  10.67,112.78 0 top
J128  [SMTSO-256-ET-0.165DIA]  10.67,105.16 0 top
J129  [1X02_NO_SILK]  14.48,107.7 90 top
J130  [SMTSO-256-ET-0.165DIA]  42.93,112.78 0 top
J131  [SMTSO-256-ET-0.165DIA]  42.93,105.16 0 top
J132  [1X02_NO_SILK]  46.74,107.7 90 top
J133  [SMTSO-256-ET-0.165DIA]  75.18,112.78 0 top
J134  [SMTSO-256-ET-0.165DIA]  75.18,105.16 0 top
J135  [1X02_NO_SILK]  78.99,107.7 90 top
J136  [SMTSO-256-ET-0.165DIA]  107.44,112.78 0 top
J137  [SMTSO-256-ET-0.165DIA]  107.44,105.16 0 top
J138  [1X02_NO_SILK]  111.25,107.7 90 top
J139  [SMTSO-256-ET-0.165DIA]  139.7,112.78 0 top
J140  [SMTSO-256-ET-0.165DIA]  139.7,105.16 0 top
J141  [1X02_NO_SILK]  143.51,107.7 90 top
J142  [SMTSO-256-ET-0.165DIA]  171.96,112.78 0 top
J143  [SMTSO-256-ET-0.165DIA]  171.96,105.16 0 top
J144  [1X02_NO_SILK]  175.77,107.7 90 top
J145  [SMTSO-256-ET-0.165DIA]  204.22,112.78 0 top
J146  [SMTSO-256-ET-0.165DIA]  204.22,105.16 0 top
J147  [1X02_NO_SILK]  208.03,107.7 90 top
JP1  JUMPER-SMT_2_NO_SILK  [SMT-JUMPER_2_NO_SILK]  28.3,15.52 0 bottom
JP2  [1X03]  69.6,18.29 270 top
JP3  [1X03]  37.34,18.29 270 top
JP4  JUMPER-SMT_2_NO_SILK  [SMT-JUMPER_2_NO_SILK]  60.55,15.52 0 bottom
JP5  [1X03]  101.85,18.29 270 top
JP6  JUMPER-SMT_2_NO_SILK  [SMT-JUMPER_2_NO_SILK]  92.81,15.52 0 bottom
JP7  [1X03]  134.11,18.29 270 top
JP8  JUMPER-SMT_2_NO_SILK  [SMT-JUMPER_2_NO_SILK]  125.07,15.52 0 bottom
JP9  [1X03]  166.37,18.29 270 top
JP10  JUMPER-SMT_2_NO_SILK  [SMT-JUMPER_2_NO_SILK]  157.33,15.52 0 bottom
JP11  [1X03]  198.63,18.29 270 top
JP12  JUMPER-SMT_2_NO_SILK  [SMT-JUMPER_2_NO_SILK]  189.59,15.52 0 bottom
JP13  [1X03]  230.89,18.29 270 top
JP14  JUMPER-SMT_2_NO_SILK  [SMT-JUMPER_2_NO_SILK]  221.84,15.52 0 bottom
JP15  [1X03]  37.34,34.04 270 top
JP16  JUMPER-SMT_2_NO_SILK  [SMT-JUMPER_2_NO_SILK]  28.3,31.27 0 bottom
JP17  [1X03]  69.6,34.04 270 top
JP18  JUMPER-SMT_2_NO_SILK  [SMT-JUMPER_2_NO_SILK]  60.55,31.27 0 bottom
JP19  [1X03]  101.85,34.04 270 top
JP20  JUMPER-SMT_2_NO_SILK  [SMT-JUMPER_2_NO_SILK]  92.81,31.27 0 bottom
JP21  [1X03]  134.11,34.04 270 top
JP22  JUMPER-SMT_2_NO_SILK  [SMT-JUMPER_2_NO_SILK]  125.07,31.27 0 bottom
JP23  [1X03]  166.37,34.04 270 top
JP24  JUMPER-SMT_2_NO_SILK  [SMT-JUMPER_2_NO_SILK]  157.33,31.27 0 bottom
JP25  [1X03]  198.63,34.04 270 top
JP26  JUMPER-SMT_2_NO_SILK  [SMT-JUMPER_2_NO_SILK]  189.59,31.27 0 bottom
JP27  [1X03]  230.89,34.04 270 top
JP28  JUMPER-SMT_2_NO_SILK  [SMT-JUMPER_2_NO_SILK]  221.84,31.27 0 bottom
JP29  [1X03]  37.34,49.78 270 top
JP30  JUMPER-SMT_2_NO_SILK  [SMT-JUMPER_2_NO_SILK]  28.3,47.02 0 bottom
JP31  [1X03]  69.6,49.78 270 top
JP32  JUMPER-SMT_2_NO_SILK  [SMT-JUMPER_2_NO_SILK]  60.55,47.02 0 bottom
JP33  [1X03]  101.85,49.78 270 top
JP34  JUMPER-SMT_2_NO_SILK  [SMT-JUMPER_2_NO_SILK]  92.81,47.02 0 bottom
JP35  [1X03]  134.11,49.78 270 top
JP36  JUMPER-SMT_2_NO_SILK  [SMT-JUMPER_2_NO_SILK]  125.07,47.02 0 bottom
JP37  [1X03]  166.37,49.78 270 top
JP38  JUMPER-SMT_2_NO_SILK  [SMT-JUMPER_2_NO_SILK]  157.33,47.02 0 bottom
JP39  [1X03]  198.63,49.78 270 top
JP40  JUMPER-SMT_2_NO_SILK  [SMT-JUMPER_2_NO_SILK]  189.59,47.02 0 bottom
JP41  [1X03]  230.89,49.78 270 top
JP42  JUMPER-SMT_2_NO_SILK  [SMT-JUMPER_2_NO_SILK]  221.84,47.02 0 bottom
JP43  [1X03]  37.34,65.53 270 top
JP44  JUMPER-SMT_2_NO_SILK  [SMT-JUMPER_2_NO_SILK]  28.3,62.76 0 bottom
JP45  [1X03]  69.6,65.53 270 top
JP46  JUMPER-SMT_2_NO_SILK  [SMT-JUMPER_2_NO_SILK]  60.55,62.76 0 bottom
JP47  [1X03]  101.85,65.53 270 top
JP48  JUMPER-SMT_2_NO_SILK  [SMT-JUMPER_2_NO_SILK]  92.81,62.76 0 bottom
JP49  [1X03]  134.11,65.53 270 top
JP50  JUMPER-SMT_2_NO_SILK  [SMT-JUMPER_2_NO_SILK]  125.07,62.76 0 bottom
JP51  [1X03]  166.37,65.53 270 top
JP52  JUMPER-SMT_2_NO_SILK  [SMT-JUMPER_2_NO_SILK]  157.33,62.76 0 bottom
JP53  [1X03]  198.63,65.53 270 top
JP54  JUMPER-SMT_2_NO_SILK  [SMT-JUMPER_2_NO_SILK]  189.59,62.76 0 bottom
JP55  [1X03]  230.89,65.53 270 top
JP56  JUMPER-SMT_2_NO_SILK  [SMT-JUMPER_2_NO_SILK]  221.84,62.76 0 bottom
JP57  [1X03]  37.34,81.28 270 top
JP58  JUMPER-SMT_2_NO_SILK  [SMT-JUMPER_2_NO_SILK]  28.3,78.51 0 bottom
JP59  [1X03]  69.6,81.28 270 top
JP60  JUMPER-SMT_2_NO_SILK  [SMT-JUMPER_2_NO_SILK]  60.55,78.51 0 bottom
JP61  [1X03]  101.85,81.28 270 top
JP62  JUMPER-SMT_2_NO_SILK  [SMT-JUMPER_2_NO_SILK]  92.81,78.51 0 bottom
JP63  [1X03]  134.11,81.28 270 top
JP64  JUMPER-SMT_2_NO_SILK  [SMT-JUMPER_2_NO_SILK]  125.07,78.51 0 bottom
JP65  [1X03]  166.37,81.28 270 top
JP66  JUMPER-SMT_2_NO_SILK  [SMT-JUMPER_2_NO_SILK]  157.33,78.51 0 bottom
JP67  [1X03]  198.63,81.28 270 top
JP68  JUMPER-SMT_2_NO_SILK  [SMT-JUMPER_2_NO_SILK]  189.59,78.51 0 bottom
JP69  [1X03]  230.89,81.28 270 top
JP70  JUMPER-SMT_2_NO_SILK  [SMT-JUMPER_2_NO_SILK]  221.84,78.51 0 bottom
JP71  [1X03]  37.34,97.03 270 top
JP72  JUMPER-SMT_2_NO_SILK  [SMT-JUMPER_2_NO_SILK]  28.3,94.26 0 bottom
JP73  [1X03]  69.6,97.03 270 top
JP74  JUMPER-SMT_2_NO_SILK  [SMT-JUMPER_2_NO_SILK]  60.55,94.26 0 bottom
JP75  [1X03]  101.85,97.03 270 top
JP76  JUMPER-SMT_2_NO_SILK  [SMT-JUMPER_2_NO_SILK]  92.81,94.26 0 bottom
JP77  [1X03]  134.11,97.03 270 top
JP78  JUMPER-SMT_2_NO_SILK  [SMT-JUMPER_2_NO_SILK]  125.07,94.26 0 bottom
JP79  [1X03]  166.37,97.03 270 top
JP80  JUMPER-SMT_2_NO_SILK  [SMT-JUMPER_2_NO_SILK]  157.33,94.26 0 bottom
JP81  [1X03]  198.63,97.03 270 top
JP82  JUMPER-SMT_2_NO_SILK  [SMT-JUMPER_2_NO_SILK]  189.59,94.26 0 bottom
JP83  [1X03]  230.89,97.03 270 top
JP84  JUMPER-SMT_2_NO_SILK  [SMT-JUMPER_2_NO_SILK]  221.84,94.26 0 bottom
JP85  [1X03]  37.34,112.78 270 top
JP86  JUMPER-SMT_2_NO_SILK  [SMT-JUMPER_2_NO_SILK]  28.3,110.01 0 bottom
JP87  [1X03]  69.6,112.78 270 top
JP88  JUMPER-SMT_2_NO_SILK  [SMT-JUMPER_2_NO_SILK]  60.55,110.01 0 bottom
JP89  [1X03]  101.85,112.78 270 top
JP90  JUMPER-SMT_2_NO_SILK  [SMT-JUMPER_2_NO_SILK]  92.81,110.01 0 bottom
JP91  [1X03]  134.11,112.78 270 top
JP92  JUMPER-SMT_2_NO_SILK  [SMT-JUMPER_2_NO_SILK]  125.07,110.01 0 bottom
JP93  [1X03]  166.37,112.78 270 top
JP94  JUMPER-SMT_2_NO_SILK  [SMT-JUMPER_2_NO_SILK]  157.33,110.01 0 bottom
JP95  [1X03]  198.63,112.78 270 top
JP96  JUMPER-SMT_2_NO_SILK  [SMT-JUMPER_2_NO_SILK]  189.59,110.01 0 bottom
JP97  [1X03]  230.89,112.78 270 top
JP98  JUMPER-SMT_2_NO_SILK  [SMT-JUMPER_2_NO_SILK]  221.84,110.01 0 bottom
LOGO1  SFE_LOGO_NAME_FLAME.1_INCH  [SFE_LOGO_NAME_FLAME_.1]  32.87,7.04 0 bottom
LOGO2  OSHW-LOGOS  [OSHW-LOGO-S]  19.1,9.06 0 bottom
LOGO3  SFE_LOGO_FLAME.1_INCH  [SFE_LOGO_FLAME_.1]  19.09,18.31 0 top
LOGO4  SFE_LOGO_NAME_FLAME.1_INCH  [SFE_LOGO_NAME_FLAME_.1]  65.13,7.04 0 bottom
LOGO5  OSHW-LOGOS  [OSHW-LOGO-S]  51.36,9.06 0 bottom
LOGO6  SFE_LOGO_FLAME.1_INCH  [SFE_LOGO_FLAME_.1]  51.35,18.31 0 top
LOGO7  SFE_LOGO_NAME_FLAME.1_INCH  [SFE_LOGO_NAME_FLAME_.1]  97.38,7.04 0 bottom
LOGO8  OSHW-LOGOS  [OSHW-LOGO-S]  83.62,9.06 0 bottom
LOGO9  SFE_LOGO_FLAME.1_INCH  [SFE_LOGO_FLAME_.1]  83.6,18.31 0 top
LOGO10  SFE_LOGO_NAME_FLAME.1_INCH  [SFE_LOGO_NAME_FLAME_.1]  129.64,7.04 0 bottom
LOGO11  OSHW-LOGOS  [OSHW-LOGO-S]  115.87,9.06 0 bottom
LOGO12  SFE_LOGO_FLAME.1_INCH  [SFE_LOGO_FLAME_.1]  115.86,18.31 0 top
LOGO13  SFE_LOGO_NAME_FLAME.1_INCH  [SFE_LOGO_NAME_FLAME_.1]  161.9,7.04 0 bottom
LOGO14  OSHW-LOGOS  [OSHW-LOGO-S]  148.13,9.06 0 bottom
LOGO15  SFE_LOGO_FLAME.1_INCH  [SFE_LOGO_FLAME_.1]  148.12,18.31 0 top
LOGO16  SFE_LOGO_NAME_FLAME.1_INCH  [SFE_LOGO_NAME_FLAME_.1]  194.16,7.04 0 bottom
LOGO17  OSHW-LOGOS  [OSHW-LOGO-S]  180.39,9.06 0 bottom
LOGO18  SFE_LOGO_FLAME.1_INCH  [SFE_LOGO_FLAME_.1]  180.38,18.31 0 top
LOGO19  SFE_LOGO_NAME_FLAME.1_INCH  [SFE_LOGO_NAME_FLAME_.1]  226.42,7.04 0 bottom
LOGO20  OSHW-LOGOS  [OSHW-LOGO-S]  212.65,9.06 0 bottom
LOGO21  SFE_LOGO_FLAME.1_INCH  [SFE_LOGO_FLAME_.1]  212.64,18.31 0 top
LOGO22  SFE_LOGO_NAME_FLAME.1_INCH  [SFE_LOGO_NAME_FLAME_.1]  32.87,22.78 0 bottom
LOGO23  OSHW-LOGOS  [OSHW-LOGO-S]  19.1,24.8 0 bottom
LOGO24  SFE_LOGO_FLAME.1_INCH  [SFE_LOGO_FLAME_.1]  19.09,34.06 0 top
LOGO25  SFE_LOGO_NAME_FLAME.1_INCH  [SFE_LOGO_NAME_FLAME_.1]  65.13,22.78 0 bottom
LOGO26  OSHW-LOGOS  [OSHW-LOGO-S]  51.36,24.8 0 bottom
LOGO27  SFE_LOGO_FLAME.1_INCH  [SFE_LOGO_FLAME_.1]  51.35,34.06 0 top
LOGO28  SFE_LOGO_NAME_FLAME.1_INCH  [SFE_LOGO_NAME_FLAME_.1]  97.38,22.78 0 bottom
LOGO29  OSHW-LOGOS  [OSHW-LOGO-S]  83.62,24.8 0 bottom
LOGO30  SFE_LOGO_FLAME.1_INCH  [SFE_LOGO_FLAME_.1]  83.6,34.06 0 top
LOGO31  SFE_LOGO_NAME_FLAME.1_INCH  [SFE_LOGO_NAME_FLAME_.1]  129.64,22.78 0 bottom
LOGO32  OSHW-LOGOS  [OSHW-LOGO-S]  115.87,24.8 0 bottom
LOGO33  SFE_LOGO_FLAME.1_INCH  [SFE_LOGO_FLAME_.1]  115.86,34.06 0 top
LOGO34  SFE_LOGO_NAME_FLAME.1_INCH  [SFE_LOGO_NAME_FLAME_.1]  161.9,22.78 0 bottom
LOGO35  OSHW-LOGOS  [OSHW-LOGO-S]  148.13,24.8 0 bottom
LOGO36  SFE_LOGO_FLAME.1_INCH  [SFE_LOGO_FLAME_.1]  148.12,34.06 0 top
LOGO37  SFE_LOGO_NAME_FLAME.1_INCH  [SFE_LOGO_NAME_FLAME_.1]  194.16,22.78 0 bottom
LOGO38  OSHW-LOGOS  [OSHW-LOGO-S]  180.39,24.8 0 bottom
LOGO39  SFE_LOGO_FLAME.1_INCH  [SFE_LOGO_FLAME_.1]  180.38,34.06 0 top
LOGO40  SFE_LOGO_NAME_FLAME.1_INCH  [SFE_LOGO_NAME_FLAME_.1]  226.42,22.78 0 bottom
LOGO41  OSHW-LOGOS  [OSHW-LOGO-S]  212.65,24.8 0 bottom
LOGO42  SFE_LOGO_FLAME.1_INCH  [SFE_LOGO_FLAME_.1]  212.64,34.06 0 top
LOGO43  SFE_LOGO_NAME_FLAME.1_INCH  [SFE_LOGO_NAME_FLAME_.1]  32.87,38.53 0 bottom
LOGO44  OSHW-LOGOS  [OSHW-LOGO-S]  19.1,40.55 0 bottom
LOGO45  SFE_LOGO_FLAME.1_INCH  [SFE_LOGO_FLAME_.1]  19.09,49.81 0 top
LOGO46  SFE_LOGO_NAME_FLAME.1_INCH  [SFE_LOGO_NAME_FLAME_.1]  65.13,38.53 0 bottom
LOGO47  OSHW-LOGOS  [OSHW-LOGO-S]  51.36,40.55 0 bottom
LOGO48  SFE_LOGO_FLAME.1_INCH  [SFE_LOGO_FLAME_.1]  51.35,49.81 0 top
LOGO49  SFE_LOGO_NAME_FLAME.1_INCH  [SFE_LOGO_NAME_FLAME_.1]  97.38,38.53 0 bottom
LOGO50  OSHW-LOGOS  [OSHW-LOGO-S]  83.62,40.55 0 bottom
LOGO51  SFE_LOGO_FLAME.1_INCH  [SFE_LOGO_FLAME_.1]  83.6,49.81 0 top
LOGO52  SFE_LOGO_NAME_FLAME.1_INCH  [SFE_LOGO_NAME_FLAME_.1]  129.64,38.53 0 bottom
LOGO53  OSHW-LOGOS  [OSHW-LOGO-S]  115.87,40.55 0 bottom
LOGO54  SFE_LOGO_FLAME.1_INCH  [SFE_LOGO_FLAME_.1]  115.86,49.81 0 top
LOGO55  SFE_LOGO_NAME_FLAME.1_INCH  [SFE_LOGO_NAME_FLAME_.1]  161.9,38.53 0 bottom
LOGO56  OSHW-LOGOS  [OSHW-LOGO-S]  148.13,40.55 0 bottom
LOGO57  SFE_LOGO_FLAME.1_INCH  [SFE_LOGO_FLAME_.1]  148.12,49.81 0 top
LOGO58  SFE_LOGO_NAME_FLAME.1_INCH  [SFE_LOGO_NAME_FLAME_.1]  194.16,38.53 0 bottom
LOGO59  OSHW-LOGOS  [OSHW-LOGO-S]  180.39,40.55 0 bottom
LOGO60  SFE_LOGO_FLAME.1_INCH  [SFE_LOGO_FLAME_.1]  180.38,49.81 0 top
LOGO61  SFE_LOGO_NAME_FLAME.1_INCH  [SFE_LOGO_NAME_FLAME_.1]  226.42,38.53 0 bottom
LOGO62  OSHW-LOGOS  [OSHW-LOGO-S]  212.65,40.55 0 bottom
LOGO63  SFE_LOGO_FLAME.1_INCH  [SFE_LOGO_FLAME_.1]  212.64,49.81 0 top
LOGO64  SFE_LOGO_NAME_FLAME.1_INCH  [SFE_LOGO_NAME_FLAME_.1]  32.87,54.28 0 bottom
LOGO65  OSHW-LOGOS  [OSHW-LOGO-S]  19.1,56.3 0 bottom
LOGO66  SFE_LOGO_FLAME.1_INCH  [SFE_LOGO_FLAME_.1]  19.09,65.56 0 top
LOGO67  SFE_LOGO_NAME_FLAME.1_INCH  [SFE_LOGO_NAME_FLAME_.1]  65.13,54.28 0 bottom
LOGO68  OSHW-LOGOS  [OSHW-LOGO-S]  51.36,56.3 0 bottom
LOGO69  SFE_LOGO_FLAME.1_INCH  [SFE_LOGO_FLAME_.1]  51.35,65.56 0 top
LOGO70  SFE_LOGO_NAME_FLAME.1_INCH  [SFE_LOGO_NAME_FLAME_.1]  97.38,54.28 0 bottom
LOGO71  OSHW-LOGOS  [OSHW-LOGO-S]  83.62,56.3 0 bottom
LOGO72  SFE_LOGO_FLAME.1_INCH  [SFE_LOGO_FLAME_.1]  83.6,65.56 0 top
LOGO73  SFE_LOGO_NAME_FLAME.1_INCH  [SFE_LOGO_NAME_FLAME_.1]  129.64,54.28 0 bottom
LOGO74  OSHW-LOGOS  [OSHW-LOGO-S]  115.87,56.3 0 bottom
LOGO75  SFE_LOGO_FLAME.1_INCH  [SFE_LOGO_FLAME_.1]  115.86,65.56 0 top
LOGO76  SFE_LOGO_NAME_FLAME.1_INCH  [SFE_LOGO_NAME_FLAME_.1]  161.9,54.28 0 bottom
LOGO77  OSHW-LOGOS  [OSHW-LOGO-S]  148.13,56.3 0 bottom
LOGO78  SFE_LOGO_FLAME.1_INCH  [SFE_LOGO_FLAME_.1]  148.12,65.56 0 top
LOGO79  SFE_LOGO_NAME_FLAME.1_INCH  [SFE_LOGO_NAME_FLAME_.1]  194.16,54.28 0 bottom
LOGO80  OSHW-LOGOS  [OSHW-LOGO-S]  180.39,56.3 0 bottom
LOGO81  SFE_LOGO_FLAME.1_INCH  [SFE_LOGO_FLAME_.1]  180.38,65.56 0 top
LOGO82  SFE_LOGO_NAME_FLAME.1_INCH  [SFE_LOGO_NAME_FLAME_.1]  226.42,54.28 0 bottom
LOGO83  OSHW-LOGOS  [OSHW-LOGO-S]  212.65,56.3 0 bottom
LOGO84  SFE_LOGO_FLAME.1_INCH  [SFE_LOGO_FLAME_.1]  212.64,65.56 0 top
LOGO85  SFE_LOGO_NAME_FLAME.1_INCH  [SFE_LOGO_NAME_FLAME_.1]  32.87,70.03 0 bottom
LOGO86  OSHW-LOGOS  [OSHW-LOGO-S]  19.1,72.05 0 bottom
LOGO87  SFE_LOGO_FLAME.1_INCH  [SFE_LOGO_FLAME_.1]  19.09,81.31 0 top
LOGO88  SFE_LOGO_NAME_FLAME.1_INCH  [SFE_LOGO_NAME_FLAME_.1]  65.13,70.03 0 bottom
LOGO89  OSHW-LOGOS  [OSHW-LOGO-S]  51.36,72.05 0 bottom
LOGO90  SFE_LOGO_FLAME.1_INCH  [SFE_LOGO_FLAME_.1]  51.35,81.31 0 top
LOGO91  SFE_LOGO_NAME_FLAME.1_INCH  [SFE_LOGO_NAME_FLAME_.1]  97.38,70.03 0 bottom
LOGO92  OSHW-LOGOS  [OSHW-LOGO-S]  83.62,72.05 0 bottom
LOGO93  SFE_LOGO_FLAME.1_INCH  [SFE_LOGO_FLAME_.1]  83.6,81.31 0 top
LOGO94  SFE_LOGO_NAME_FLAME.1_INCH  [SFE_LOGO_NAME_FLAME_.1]  129.64,70.03 0 bottom
LOGO95  OSHW-LOGOS  [OSHW-LOGO-S]  115.87,72.05 0 bottom
LOGO96  SFE_LOGO_FLAME.1_INCH  [SFE_LOGO_FLAME_.1]  115.86,81.31 0 top
LOGO97  SFE_LOGO_NAME_FLAME.1_INCH  [SFE_LOGO_NAME_FLAME_.1]  161.9,70.03 0 bottom
LOGO98  OSHW-LOGOS  [OSHW-LOGO-S]  148.13,72.05 0 bottom
LOGO99  SFE_LOGO_FLAME.1_INCH  [SFE_LOGO_FLAME_.1]  148.12,81.31 0 top
LOGO100  SFE_LOGO_NAME_FLAME.1_INCH  [SFE_LOGO_NAME_FLAME_.1]  194.16,70.03 0 bottom
LOGO101  OSHW-LOGOS  [OSHW-LOGO-S]  180.39,72.05 0 bottom
LOGO102  SFE_LOGO_FLAME.1_INCH  [SFE_LOGO_FLAME_.1]  180.38,81.31 0 top
LOGO103  SFE_LOGO_NAME_FLAME.1_INCH  [SFE_LOGO_NAME_FLAME_.1]  226.42,70.03 0 bottom
LOGO104  OSHW-LOGOS  [OSHW-LOGO-S]  212.65,72.05 0 bottom
LOGO105  SFE_LOGO_FLAME.1_INCH  [SFE_LOGO_FLAME_.1]  212.64,81.31 0 top
LOGO106  SFE_LOGO_NAME_FLAME.1_INCH  [SFE_LOGO_NAME_FLAME_.1]  32.87,85.78 0 bottom
LOGO107  OSHW-LOGOS  [OSHW-LOGO-S]  19.1,87.8 0 bottom
LOGO108  SFE_LOGO_FLAME.1_INCH  [SFE_LOGO_FLAME_.1]  19.09,97.05 0 top
LOGO109  SFE_LOGO_NAME_FLAME.1_INCH  [SFE_LOGO_NAME_FLAME_.1]  65.13,85.78 0 bottom
LOGO110  OSHW-LOGOS  [OSHW-LOGO-S]  51.36,87.8 0 bottom
LOGO111  SFE_LOGO_FLAME.1_INCH  [SFE_LOGO_FLAME_.1]  51.35,97.05 0 top
LOGO112  SFE_LOGO_NAME_FLAME.1_INCH  [SFE_LOGO_NAME_FLAME_.1]  97.38,85.78 0 bottom
LOGO113  OSHW-LOGOS  [OSHW-LOGO-S]  83.62,87.8 0 bottom
LOGO114  SFE_LOGO_FLAME.1_INCH  [SFE_LOGO_FLAME_.1]  83.6,97.05 0 top
LOGO115  SFE_LOGO_NAME_FLAME.1_INCH  [SFE_LOGO_NAME_FLAME_.1]  129.64,85.78 0 bottom
LOGO116  OSHW-LOGOS  [OSHW-LOGO-S]  115.87,87.8 0 bottom
LOGO117  SFE_LOGO_FLAME.1_INCH  [SFE_LOGO_FLAME_.1]  115.86,97.05 0 top
LOGO118  SFE_LOGO_NAME_FLAME.1_INCH  [SFE_LOGO_NAME_FLAME_.1]  161.9,85.78 0 bottom
LOGO119  OSHW-LOGOS  [OSHW-LOGO-S]  148.13,87.8 0 bottom
LOGO120  SFE_LOGO_FLAME.1_INCH  [SFE_LOGO_FLAME_.1]  148.12,97.05 0 top
LOGO121  SFE_LOGO_NAME_FLAME.1_INCH  [SFE_LOGO_NAME_FLAME_.1]  194.16,85.78 0 bottom
LOGO122  OSHW-LOGOS  [OSHW-LOGO-S]  180.39,87.8 0 bottom
LOGO123  SFE_LOGO_FLAME.1_INCH  [SFE_LOGO_FLAME_.1]  180.38,97.05 0 top
LOGO124  SFE_LOGO_NAME_FLAME.1_INCH  [SFE_LOGO_NAME_FLAME_.1]  226.42,85.78 0 bottom
LOGO125  OSHW-LOGOS  [OSHW-LOGO-S]  212.65,87.8 0 bottom
LOGO126  SFE_LOGO_FLAME.1_INCH  [SFE_LOGO_FLAME_.1]  212.64,97.05 0 top
LOGO127  SFE_LOGO_NAME_FLAME.1_INCH  [SFE_LOGO_NAME_FLAME_.1]  32.87,101.52 0 bottom
LOGO128  OSHW-LOGOS  [OSHW-LOGO-S]  19.1,103.54 0 bottom
LOGO129  SFE_LOGO_FLAME.1_INCH  [SFE_LOGO_FLAME_.1]  19.09,112.8 0 top
LOGO130  SFE_LOGO_NAME_FLAME.1_INCH  [SFE_LOGO_NAME_FLAME_.1]  65.13,101.52 0 bottom
LOGO131  OSHW-LOGOS  [OSHW-LOGO-S]  51.36,103.54 0 bottom
LOGO132  SFE_LOGO_FLAME.1_INCH  [SFE_LOGO_FLAME_.1]  51.35,112.8 0 top
LOGO133  SFE_LOGO_NAME_FLAME.1_INCH  [SFE_LOGO_NAME_FLAME_.1]  97.38,101.52 0 bottom
LOGO134  OSHW-LOGOS  [OSHW-LOGO-S]  83.62,103.54 0 bottom
LOGO135  SFE_LOGO_FLAME.1_INCH  [SFE_LOGO_FLAME_.1]  83.6,112.8 0 top
LOGO136  SFE_LOGO_NAME_FLAME.1_INCH  [SFE_LOGO_NAME_FLAME_.1]  129.64,101.52 0 bottom
LOGO137  OSHW-LOGOS  [OSHW-LOGO-S]  115.87,103.54 0 bottom
LOGO138  SFE_LOGO_FLAME.1_INCH  [SFE_LOGO_FLAME_.1]  115.86,112.8 0 top
LOGO139  SFE_LOGO_NAME_FLAME.1_INCH  [SFE_LOGO_NAME_FLAME_.1]  161.9,101.52 0 bottom
LOGO140  OSHW-LOGOS  [OSHW-LOGO-S]  148.13,103.54 0 bottom
LOGO141  SFE_LOGO_FLAME.1_INCH  [SFE_LOGO_FLAME_.1]  148.12,112.8 0 top
LOGO142  SFE_LOGO_NAME_FLAME.1_INCH  [SFE_LOGO_NAME_FLAME_.1]  194.16,101.52 0 bottom
LOGO143  OSHW-LOGOS  [OSHW-LOGO-S]  180.39,103.54 0 bottom
LOGO144  SFE_LOGO_FLAME.1_INCH  [SFE_LOGO_FLAME_.1]  180.38,112.8 0 top
LOGO145  SFE_LOGO_NAME_FLAME.1_INCH  [SFE_LOGO_NAME_FLAME_.1]  226.42,101.52 0 bottom
LOGO146  OSHW-LOGOS  [OSHW-LOGO-S]  212.65,103.54 0 bottom
LOGO147  SFE_LOGO_FLAME.1_INCH  [SFE_LOGO_FLAME_.1]  212.64,112.8 0 top
R1  22k  [0603]  30.48,10.29 180 top
R2  1k  [0603]  25.4,13.65 90 top
R3  22k  [0603]  62.74,10.29 180 top
R4  1k  [0603]  57.66,13.65 90 top
R5  4.7k  [0603]  26.92,13.65 90 top
R6  4.7k  [0603]  59.18,13.65 90 top
R7  22k  [0603]  95,10.29 180 top
R8  1k  [0603]  89.92,13.65 90 top
R9  4.7k  [0603]  91.44,13.65 90 top
R10  22k  [0603]  127.25,10.29 180 top
R11  1k  [0603]  122.17,13.65 90 top
R12  4.7k  [0603]  123.7,13.65 90 top
R13  22k  [0603]  159.51,10.29 180 top
R14  1k  [0603]  154.43,13.65 90 top
R15  4.7k  [0603]  155.96,13.65 90 top
R16  22k  [0603]  191.77,10.29 180 top
R17  1k  [0603]  186.69,13.65 90 top
R18  4.7k  [0603]  188.21,13.65 90 top
R19  22k  [0603]  224.03,10.29 180 top
R20  1k  [0603]  218.95,13.65 90 top
R21  4.7k  [0603]  220.47,13.65 90 top
R22  22k  [0603]  30.48,26.04 180 top
R23  1k  [0603]  25.4,29.4 90 top
R24  4.7k  [0603]  26.92,29.4 90 top
R25  22k  [0603]  62.74,26.04 180 top
R26  1k  [0603]  57.66,29.4 90 top
R27  4.7k  [0603]  59.18,29.4 90 top
R28  22k  [0603]  95,26.04 180 top
R29  1k  [0603]  89.92,29.4 90 top
R30  4.7k  [0603]  91.44,29.4 90 top
R31  22k  [0603]  127.25,26.04 180 top
R32  1k  [0603]  122.17,29.4 90 top
R33  4.7k  [0603]  123.7,29.4 90 top
R34  22k  [0603]  159.51,26.04 180 top
R35  1k  [0603]  154.43,29.4 90 top
R36  4.7k  [0603]  155.96,29.4 90 top
R37  22k  [0603]  191.77,26.04 180 top
R38  1k  [0603]  186.69,29.4 90 top
R39  4.7k  [0603]  188.21,29.4 90 top
R40  22k  [0603]  224.03,26.04 180 top
R41  1k  [0603]  218.95,29.4 90 top
R42  4.7k  [0603]  220.47,29.4 90 top
R43  22k  [0603]  30.48,41.78 180 top
R44  1k  [0603]  25.4,45.15 90 top
R45  4.7k  [0603]  26.92,45.15 90 top
R46  22k  [0603]  62.74,41.78 180 top
R47  1k  [0603]  57.66,45.15 90 top
R48  4.7k  [0603]  59.18,45.15 90 top
R49  22k  [0603]  95,41.78 180 top
R50  1k  [0603]  89.92,45.15 90 top
R51  4.7k  [0603]  91.44,45.15 90 top
R52  22k  [0603]  127.25,41.78 180 top
R53  1k  [0603]  122.17,45.15 90 top
R54  4.7k  [0603]  123.7,45.15 90 top
R55  22k  [0603]  159.51,41.78 180 top
R56  1k  [0603]  154.43,45.15 90 top
R57  4.7k  [0603]  155.96,45.15 90 top